# Altium PCB PCB1bjarni.PcbDoc
Units mil, origin at the board's own origin, x right, y up, seen from the top; angles counter-clockwise.
Board outline 3165.25 x 5115 mil, 2 copper layers (Top Layer, Bottom Layer); 82 components, 72 nets, 267 pads, 22 vias.
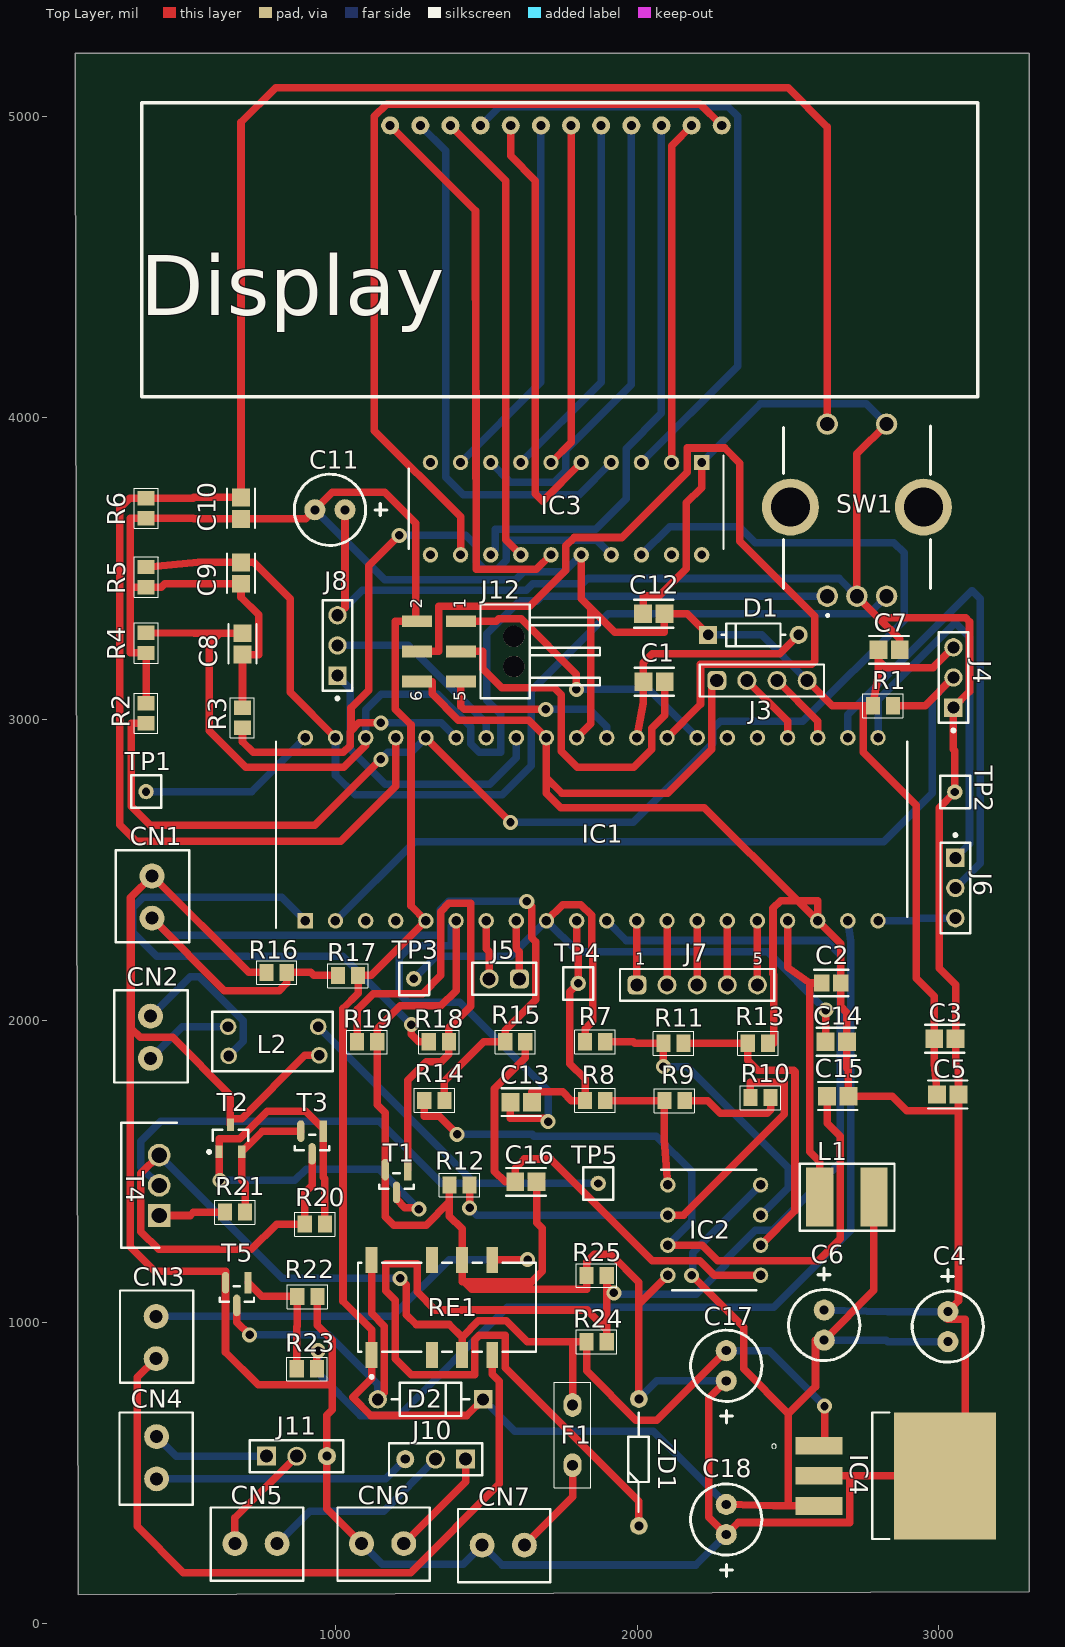
[diagram p0: Top Layer view]
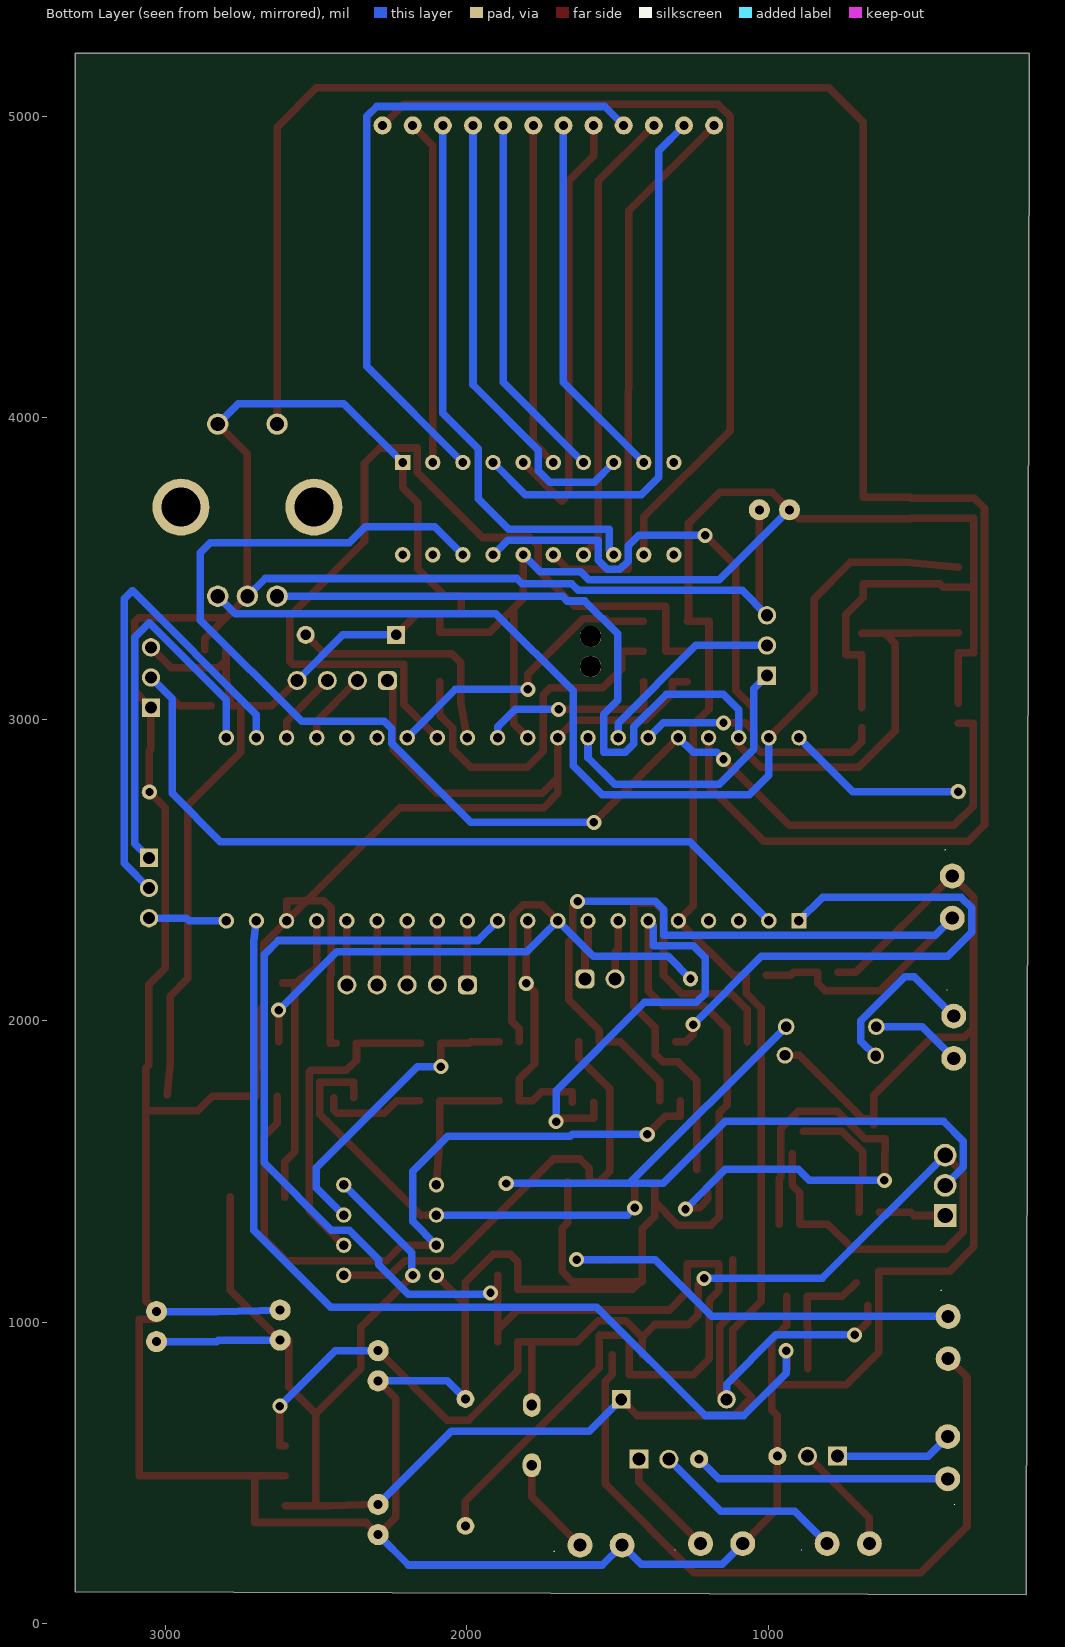
[diagram p1: Bottom Layer view, seen from below]

## Layer stack, top to bottom
Top Solder: solder mask 0.4, Solder Resist, Dk 3.5
Top Layer: signal copper 1.4
Dielectric 1: dielectric 12.6, FR-4, Dk 4.8
Bottom Layer: signal copper 1.4
Bottom Solder: solder mask 0.4, Solder Resist, Dk 3.5

## Board outline
3300,5210 3300,5085 3300,105 145,95 145,110 135,5085 135,5050 134.75,5210

## Design rules (kind name [scope] priority, off if disabled: settings)
Clearance [All] p1: gap=10 ignorepadtopadclearanceinfootprint=FALSE
HoleSize [All] p1: absolutevalues=TRUE maxlimit=200 minlimit=1 maxpercent=80.000 minpercent=20.000
PolygonConnect [All] p1: connectstyle=Relief reliefconductorwidth=10 reliefentries=4 polygonreliefangle="90 Angle" airgapwidth=10
RoutingVias [All] p1: holewidth=28 width=50 viastyle="Through Hole" minholewidth=28 minwidth=50 maxholewidth=28 maxwidth=50
SilkToSilkClearance [All] p1: silktosilkclearance=0
SilkToSolderMaskClearance [IsPad] p1: minsilkscreentomaskgap=0 clearancetoexposedcopper=TRUE
SolderMaskExpansion [All] p1: expansion=4 istentingtop=FALSE
Width [All] p1: maxlimit=30 minlimit=20 preferedwidth=25 minimp=50.000000 maximp=50.000000 favimp=50.000000
27 further rules are at their usual default settings.

## Classes and differential pairs
component class SolBoutout: CN2 L2 R18 R19 R20 R21 T1 T2 T3 T4 TP5
component class SolBoutin: C13 C14 C15 C16 CN1 IC2 R7 R8 R9 R10 R11 R12 R13 R14 R15 R16 R17 TP3 TP4
component class Display: C8 C9 C10 C11 C12 IC3 J9 R4 R5 R6 SW1
component class CPU: C1 C2 C3 C4 C5 C6 C7 D1 IC1 J1 J3 J4 J5 J6 J7 J8 J12 L1 R1 R2 R3 TP1 TP2
component class "Bat 20Vvoeding": C17 C18 CN3 CN4 CN5 CN6 CN7 D2 F1 IC4 J10 J11 R22 R23 R24 R25 RE1 T5 ZD1

## Components (designator, comment, footprint, x,y, rotation, side; value= is the part's Value field where it differs from the comment)
C1 "10n" FP-C0805C-DN-IPC_A 2055.46,3125 r0 top value="10,000 pF"
C2 "100n" FP-C0805C-DN-IPC_B 2643.47,2125 r0 top value="10,000 pF"
C3 "100n" FP-C0805C-DN-IPC_A 3020.46,1940 r0 top value="10,000 pF"
C4 "10µF 50V" caprad100mil 3030,935 r90 top
C5 "100n" FP-C0805C-DN-IPC_A 3030,1755 r0 top value="10,000 pF"
C6 "10uF 50V" caprad100mil 2620,940 r90 top
C7 "10n" FP-C0805C-DN-IPC_A 2835,3230 r0 top value="10,000 pF"
C8 "10n" FP-C0805C-DN-IPC_A 690,3250 r90 top value="10,000 pF"
C9 "10n" FP-C0805C-DN-IPC_A 685,3485 r90 top value="10,000 pF"
C10 "10n" FP-C0805C-DN-IPC_A 685,3700.46 r90 top value="10,000 pF"
C11 "100uF" caprad100mil 930,3695 r0 top
C12 "100n" FP-C0805C-DN-IPC_A 2054.54,3350 r180 top value="10,000 pF"
C13 "10n" FP-C0805C-DN-IPC_A 1614.54,1730 r180 top value="10,000 pF"
C14 "10n" FP-C0805C-DN-IPC_A 2660,1930 r0 top value="10,000 pF"
C15 "10n" FP-C0805C-DN-IPC_A 2665,1750 r0 top value="10,000 pF"
C16 "10n" FP-C0805C-DN-IPC_A 1630.46,1465 r0 top value="10,000 pF"
C17 "100µF 25V" caprad100mil 2295,905 r270 top
C18 "10µF 50V" caprad100mil 2295,395 r270 top
CN1 "282836-2" cnn2pin 390,2410 r90 top
CN2 "282836-2" cnn2pin 385,1945 r90 top
CN3 "282836-2" cnn2pin 403.48,948.64 r90 top
CN4 "282836-2" cnn2pin 405,550 r270 top
CN5 "282836-2" cnn2pin 735,265 r0 top
CN6 "282836-2" cnn2pin 1155,265 r0 top
CN7 "282836-2" cnn2pin 1555,260 r0 top
D1 "1N4148" FP-017AG-MFG 2385,3280 r0 top
D2 "1N4007" FP-1N4007-MFG 1313.48,743.64 r180 top value=15pF
DP1 "ELCO220uF" display 355,4070 r0 top
F1 "4,7K" Fuze -3315,-42975 r270 top
IC1 "ATMEGA4809-PF" DIP1543W58P254L5175H635Q40N 1848.48,2634.9 r90 top
IC2 "MCP6002-E/P" DIP8PIN 2255,1305 r0 top
IC3 "TM1637" DIP778W53P254L2612H431Q20N 1763.48,3698.64 r270 top
IC4 "TL780-05CKTTR" TL78005CKTTR 2868.23,490 r270 top
J3 "61300411121" 61300411121 2413.48,3128.64 r0 top
J4 "22-28-4033" MOLX-22-28-4033_V 3048.48,3138.64 r90 top
J5 "61300211121" 61300211121 1558.48,2138.64 r180 top
J6 "22-28-4033" MOLX-22-28-4033_V 3055,2440 r270 top
J7 "61300511121" 61300511121 2198.48,2118.64 r0 top
J8 "22-28-4033" MOLX-22-28-4033_V 1005,3245 r90 top
J10 "" 3pinsheader 1330,545 r180 top
J11 "" 3pinsheader 870,555 r0 top
J12 "610106249121" 610106249121 1561.26,3225 r90 top
L1 "10µH" spoelSMD10µH 2695,1415 r0 top
L2 "Spoel" CoilCM2545 642,1980 r0 top
R1 "4K7" res0805ph 2815,3045 r0 top
R2 "4K7" res0805ph 370,3020 r270 top
R3 "4K7" res0805ph 690,3005 r270 top
R4 "10K" res0805ph 370,3253.46 r90 top
R5 "10K" res0805ph 370,3471.53 r90 top
R6 "10K" res0805ph 370,3700 r90 top
R7 "5K6" res0805ph 1860,1930 r180 top
R8 "5K6" res0805ph 1860,1735 r180 top
R9 "18K" res0805ph 2123.47,1735 r0 top
R10 "18K" res0805ph 2408.47,1745 r0 top
R11 "18K" res0805ph 2120,1925 r180 top
R12 "100E" res0805ph 1410,1455 r0 top
R13 "100E" res0805ph 2400,1925 r180 top
R14 "5K6" res0805ph 1326.54,1735 r180 top
R15 "5K6" res0805ph 1595,1930 r0 top
R16 "10M" res0805ph 803.46,2160 r0 top
R17 "1M" res0805ph 1040,2150 r0 top
R18 "10K" res0805ph 1341.54,1930 r0 top
R19 "4,7K" res0805ph 1103.46,1930 r0 top
R20 "4,7K" res0805ph 930,1325 r0 top
R21 "100E" res0805ph 665,1365 r0 top
R22 "4,7K" res0805ph 905,1085 r0 top
R23 "10K" res0805ph 903.46,845 r0 top
R24 "6,8K" res0805ph 1865,935 r0 top
R25 "10K" res0805ph 1865,1155 r0 top
RE1 "G6S-2F-DC5" FP-G6S-2F-DC5-MFG 1368.48,1048.64 r0 top
SW1 "PEC11R-4" PEC12R-4XXXF-SXXXX_1 2728.48,3703.64 r0 top
T1 "BC847B" sot23 1200,1495 r270 top
T2 "BC857C" INF-SOT23_N 650,1610 r90 top
T3 "BC847B" sot23 919.88,1622.84 r270 top
T4 "IRF9Z34NPBF" TO254P469X1042X1967-3P 413.48,1353.64 r90 top
T5 "BC847B" sot23 670,1120 r270 top
TP1 "testpoint" testpin 370,2760 r0 top
TP2 "testpoint" testpin 3053.48,2758.64 r0 top
TP3 "testpoint" testpin 1258.48,2138.64 r0 top
TP4 "testpoint" testpin 1803.48,2123.64 r0 top
TP5 "testpoint" testpin 1870,1460 r0 top
ZD1 "5V1" DIOAD1068W53L380D172 2005,323.74 r90 top

## Footprints (in the part's own frame and the unit in brackets; to place one, negate y for a bottom-side part, rotate by r counter-clockwise, add the part's x,y. Pads: shape width x height; smd on the part's side, far side on the other; paste and mask are expansions set on the pad)
3pinsheader [mm] "Pin Header, pitch 2.54 mm, THT, Vertical, single row, 2p"
  rect 1.6x1.6 hole 1.1: 1(-2.54,0)
  round 1.6 hole 1.1: 2(0,0)
  round 1.524 hole 0.762: 3(2.54,0)
  silkscreen extent -3.96,-1.34 3.91,1.34
61300211121 [mm] "Pin Header, pitch 2.54 mm, THT, Vertical, single row, 2p"
  rrect50% 1.6x1.6 hole 1.1: 1(-1.27,0)
  round 1.6 hole 1.1: 2(1.27,0)
  silkscreen extent -2.69,-1.35 2.69,1.34, body extent -2.54,-1.27 2.54,1.27, height 8.57
61300411121 [mm] "Pin Header, pitch 2.54 mm, THT, Vertical, single row, 4p"
  rrect50% 1.6x1.6 hole 1.1: 1(-3.81,0)
  round 1.6 hole 1.1: 2(-1.27,0) 3(1.27,0) 4(3.81,0)
  silkscreen extent -5.23,-1.34 5.23,1.35, body extent -5.08,-1.27 5.08,1.27, height 8.57
61300511121 [mm] "Pin Header, pitch 2.54 mm, THT, Vertical, single row, 5p"
  rrect50% 1.6x1.6 hole 1.1: 1(-5.08,0)
  round 1.6 hole 1.1: 2(-2.54,0) 3(0,0) 4(2.54,0) 5(5.08,0)
  silkscreen extent -6.5,-1.34 6.5,1.35, body extent -6.35,-1.27 6.35,1.27, height 8.57
610106249121 [mm] "Pin Header, pitch 2.54 mm, SMD, Angled, dual row, 6p"
  rect 1x2.5 smd: 1(2.54,3.72) 2(2.54,7.42) 3(0,3.72) 4(0,7.42) 5(-2.54,3.72) 6(-2.54,7.42)
  round 1.8 hole 1.8 unplated: MH1(1.27,-0.73) MH2(-1.27,-0.73)
  silkscreen extent -3.96,-8 3.96,2.08, body extent -3.81,-8 3.81,8.16, height 5.1
caprad100mil [mil]
  round 70 hole 30: 1(0,0) 2(100,0)
  silkscreen extent -68,-118 239,118
cnn2pin [mm]
  round 2.1 hole 1.1: 1(-1.778,0) 2(1.778,0)
  silkscreen extent -3.81,-3.12 3.96,3.05
CoilCM2545 [mm]
  round 1.4 hole 0.9: 1(0,0) 2(0.051,-2.464) 3(7.696,-2.413) 4(7.595,0)
  silkscreen extent -1.32,-3.75 8.84,1.25
DIOAD1068W53L380D172 [mm]
  round 1.5 hole 0.75: 1(0,0) 2(10.7,0)
  silkscreen extent 1.18,-0.83 9.55,0.89
DIP8PIN [mm]
  round 1.3 hole 0.8: 1(-3.905,3.81) 2(-3.905,1.27) 3(-3.905,-1.27) 4(-3.905,-3.81) 5(3.905,-3.81) 6(3.905,-1.27) 7(3.905,1.27) 8(3.905,3.81)
  silkscreen extent -4.48,-5.08 3.56,5.08, body extent -4.04,-4.75 4.04,4.75, height 5.33
DIP778W53P254L2612H431Q20N [mm]
  rect 1.3x1.3 hole 0.73: 1(-3.892,11.43)
  round 1.3 hole 0.73: 2(-3.892,8.89) 3(-3.892,6.35) 4(-3.892,3.81) 5(-3.892,1.27) 6(-3.892,-1.27) 7(-3.892,-3.81) 8(-3.892,-6.35) 9(-3.892,-8.89) 10(-3.892,-11.43) 11(3.892,-11.43) 12(3.892,-8.89) 13(3.892,-6.35) 14(3.892,-3.81) 15(3.892,-1.27) 16(3.892,1.27) 17(3.892,3.81) 18(3.892,6.35) 19(3.892,8.89) 20(3.892,11.43)
  silkscreen extent -4.46,-13.27 3.37,13.27, body extent -4.03,-13.06 4.03,13.06, height 4.31
DIP1543W58P254L5175H635Q40N [mm]
  rect 1.3x1.3 hole 0.8: 1(-7.715,24.13)
  round 1.3 hole 0.8: 2(-7.715,21.59) 3(-7.715,19.05) 4(-7.715,16.51) 5(-7.715,13.97) 6(-7.715,11.43) 7(-7.715,8.89) 8(-7.715,6.35) 9(-7.715,3.81) 10(-7.715,1.27) 11(-7.715,-1.27) 12(-7.715,-3.81) 13(-7.715,-6.35) 14(-7.715,-8.89) 15(-7.715,-11.43) 16(-7.715,-13.97) 17(-7.715,-16.51) 18(-7.715,-19.05) 19(-7.715,-21.59) 20(-7.715,-24.13) 21(7.715,-24.13) 22(7.715,-21.59) 23(7.715,-19.05) 24(7.715,-16.51) 25(7.715,-13.97) 26(7.715,-11.43) 27(7.715,-8.89) 28(7.715,-6.35) 29(7.715,-3.81) 30(7.715,-1.27) 31(7.715,1.27) 32(7.715,3.81) 33(7.715,6.35) 34(7.715,8.89) 35(7.715,11.43) 36(7.715,13.97) 37(7.715,16.51) 38(7.715,19.05) 39(7.715,21.59) 40(7.715,24.13)
  silkscreen extent -8.31,-26.61 7.37,26.61, body extent -7.86,-25.88 7.86,25.88, height 6.35
display [mil]
  round 60 hole 30: 1(825,900) 2(925,900) 3(1025,900) 4(1125,900) 5(1225,900) 6(1325,900) 7(1425,900) 8(1525,900) 9(1625,900) 10(1725,900) 11(1825,900) 12(1925,900)
  silkscreen extent 0,0 2775,975
FP-1N4007-MFG [mm]
  rect 1.55x1.55 hole 1 paste-2539.97 mask+0: 1(-4.44,0)
  round 1.55 hole 1 paste-2539.97 mask+0: 2(4.44,0)
  silkscreen extent -3.27,-1.4 3.27,1.4, body extent -5.32,-1.5 5.32,1.5, height 0.25
FP-017AG-MFG [mil]
  rect 60x60 hole 35 paste-99999 mask+0: 1(-150.12,0)
  round 60 hole 35 paste-99999 mask+0: 2(150.12,0)
  silkscreen extent -106,-38 106,38, body extent -178,-42 178,42, height 10
FP-C0805C-DN-IPC_A [mil]
  rect 59.24x61.27 smd paste+0 mask+0: 1(-35.46,0) 2(35.46,0)
  silkscreen extent -65,-46 65,46, body extent -85,-50 85,50, height 10
FP-C0805C-DN-IPC_B [mil]
  rect 51.36x57.33 smd paste+0 mask+0: 1(-31.53,0) 2(31.53,0)
  silkscreen extent -57,-44 57,44, body extent -67,-39 67,39, height 10
FP-G6S-2F-DC5-MFG [mm]
  rect 1x2.2 smd paste+0 mask+0: 1(-6.35,-4) 3(-1.27,-4) 4(1.27,-4) 5(3.81,-4) 8(3.81,4) 9(1.27,4) 10(-1.27,4) 12(-6.35,4)
  silkscreen extent -7.5,-5.97 7.5,3.75
Fuze [mm]
  oval 2x1.5 hole 0.9: 1(-1109.98,129.54)
  oval 2x1.524 hole 0.9: 2(-1104.9,129.54)
  silkscreen extent -1111.89,128.02 -1103,131.06
INF-SOT23_N [mm] "SOT23, 3-Leads, Body 2.9x1.3 mm, Pitch 0.95 mm, IPC Medium Density"
  rect 1.05x0.6 smd: 1(-1.15,0.95) 2(-1.15,-0.95) 3(1.15,0)
  silkscreen extent -1.27,-1.5 0.7,1.92, body extent -0.7,-1.5 0.7,1.5, height 1.1
MOLX-22-28-4033_V [mm] "THD, 3-Leads, Body 7.62x2.49mm, Pitch 2.54mm"
  rect 1.55x1.55 hole 1.02: 1(-2.54,0)
  round 1.55 hole 1.02: 2(0,0) 3(2.54,0)
  silkscreen extent -4.58,-1.24 3.81,1.25, body extent -3.81,-1.24 3.81,1.24, height 8.38
PEC12R-4XXXF-SXXXX_1 [mm]
  round 1.8 hole 1.2: 1(-2.5,-7.5) 2(2.5,-7.5) 3(0,-7.5) 4(-2.5,7) 5(2.5,7)
  round 4.8 hole 3.28: 6(5.6,0) 7(-5.6,0)
  silkscreen extent -6.2,-9.2 6.2,6.84
res0805ph [mm]
  rect 1.2x1.45 smd: 1(-0.85,0) 2(0.85,0)
  silkscreen extent -1.7,-1.02 1.7,0.99, body extent -1.1,-0.72 1.1,0.72, height 0.6
sot23 [mil]
  rect 71.82x24.33 smd paste+0 mask+0: 1(-10.8,38.4)
  rrect100% 71.82x24.33 smd paste+0 mask+0: 2(-10.8,-36.4) 3(64.8,1)
  silkscreen extent 1,-56 53,58, body extent -66,-76 120,78, height 10
spoelSMD10µH [mm]
  rect 2.3x5 smd: 1(-2.286,0) 2(2.286,0)
  silkscreen extent -3.98,-2.84 4.01,2.8
testpin [mm]
  round 1.3 hole 0.7: 1(0,0)
  silkscreen extent -1.24,-1.37 1.29,1.37
TL78005CKTTR [mm]
  rect 1.5x4 smd: 1(-2.54,-6.745) 2(0,-6.745) 3(2.54,-6.745)
  rect 10.7x8.6 smd: 4(0,3.855)
  silkscreen extent -5.33,-10.73 5.33,-0.8
TO254P469X1042X1967-3P [mm]
  rect 1.92x1.92 hole 1.28: 1(0,0)
  round 1.92 hole 1.28: 2(2.54,0) 3(5.08,0)
  silkscreen extent -2.73,-1.49 7.81,3.2, body extent -2.67,-1.5 7.75,3.19, height 18.84

## Part data
C1 C2 C3 C5 C7 C8 C9 C10 C12 C13 C14 C15 C16: library part CMP-2007-00259-2, "CAP CER 10000PF 200V X7R 0805", Capacitance="10,000 pF", Manufacturer=KEMET, Manufacturer Part Number=C0805C103K2RACTU, Package=C0805C-DN, Temperature="-55°C to +125°C", Temperature Characteristic=X7R, Temperature Coefficient=30ppm/°C, Temperature Range High=+125°C, Temperature Range Low=-55°C, Tolerance=0.1, Voltage Rating="200 V", Automotive=No, Category=Cap, ComponentLink2Description=Datasheet, ComponentLink2URL=https://content.kemet.com/datasheets/KEM_C1003_C0G_SMD.pdf, Device Class L1="Passive Components", Device Class L2=Capacitors, Device Class L3="Ceramic Capacitors", Digikey Description="CAP CER 10000PF 200V X7R 0805", Height=0.88mm, Ipc Land Pattern Name=CAPC200125X78, Lead Free=Yes, Material=Ceramic, Mouser Description="KEMET - C0805C103K2RACTU - CAP, MLCC, X7R, 10NF, 200V, 0805", Octopart=https://octopart.com/c0805c103k2ractu-kemet-9138347, RoHS=TRUE
C4 C6 C11 C17 C18: library part ELCO220uF, "Capacitor Polarised", Manufacturer_Name=Kemet, Manufacturer_Part_Number=T494D227K006AT, Mouser Part Number=80-T494D227K006, Datasheet Link=https://datasheet.datasheetarchive.com/originals/distributors/Datasheets-DGA21/1893029.pdf, Height=3.1mm, Mouser Price/Stock=https://www.mouser.co.uk/ProductDetail/KEMET/T494D227K006AT/?qs=KZyWKl2lJVCDSHmnBye8LQ%3D%3D
CN1 CN2 CN3 CN4 CN5 CN6 CN7: library part CNN2P, "Female Header, Pitch 5 mm, 1 x 2 Position, Height 10 mm, Tail Length 3.5 mm, Rohs, Bulk", Color=Green, Current=13.5A, Manufacturer="TE Connectivity", Package Description="Female Header, Pitch 5 mm, 1 x 2 Position, Height 10 mm, Tail Length 3.5 mm", Package Reference=THD, Standard Package=300, Voltage=300V, 3D Model=282836-2.pdf, Category=Connectors,Interconnects, Clamp Material - Plating=Brass-NickelPlated, Contact Material - Plating=Brass-TinPlated, Datasheet URL=http://www.te.com.cn/commerce/DocumentDelivery/DDEController?Action=showdoc&DocId=Catalog+Section%7F1308389_EUROSTYLE_TERMINAL_BLOCKS%7F0607%7Fpdf%7FEnglish%7FENG_CS_1308389_EUROSTYLE_TERMINAL_BLOCKS_0607.pdf%7F282836-2, Dynamic Catalog=BuchananSeries, Family=TerminalBlocks-WiretoBoard, Featured Product=EurostyleTerminalBlockConnectors, Features=Interlocking(Side), Housing Material=Polyamide(PA66),Nylon6/6, Manufacturer URL=http://www.te.com, Mating Orientation=HorizontalwithBoard, Mounting Type=ThroughHole, Number of Levels=1, Other Names="5ULV-02B / A98076", Packaging=Bulk, Pitch="0.197\"(5.00mm)", Positions Per Level=2, Product Training Modules=Wire-to-BoardEurostyleTerminalBlocks, RoHS Information=282836-2StatementofCompliance, Screw Material - Plating=Brass-NickelPlated, Screw Thread=M3, Series=Buchanan, Torque - Screw=0.68Nm(6Lb-In), Wire Gauge=16-30AWG, Wire Termination=Screw-RisingCageClamp
D1: library part CMP-07163-000046-1, "DIODE GEN PURP 100V 200MA DO35", Average Rectified Current=200mA, Capacitance=4pF, Case/Package=DO-35, Current=4A, Forward Current=300mA, Forward Voltage=1V, Max Forward Surge Current (Ifsm)=1A, Max Operating Temperature=175°C, Max Power Dissipation=500mW, Max Repetitive Reverse Voltage (Vrrm)=100V, Max Reverse Current=5uA, Min Operating Temperature=-65°C, Package Quantity=2000, Contact Plating=Tin, Current Rating=200mA, Diameter=1.91mm, Element Configuration=Single, Height=4.56mm, Lead Free="Lead Free", Length=4.56mm, Max Reverse Voltage (DC)=100V, Max Surge Current=4A, Mount="Through Hole", Number of Pins=2, Output Current=200mA, Outside Diameter=1.85mm, Packaging=Bulk, Peak Non-Repetitive Surge Current=4A, Polarity=Standard, Power Dissipation=500mW, Radiation Hardening=No, REACH SVHC="No SVHC", Recovery Time=4ns, Reverse Recovery Time=4ns, Reverse Voltage=100V, Series=-, Voltage=100V, Voltage Rating (DC)=100V, Weight=0.01lb, Width=1.91mm
D2: library part CMP-123542-000001-1, "Rectifier diode 1000 V 1 A DO-41, ,", Capacitance=15pF, Forward Current=1A, Manufacturer=Diotec, Max Junction Temp=+175°C, Max Repetitive Reverse Voltage=1000V, Max Surge Forward Current=27A, Peak Reverse Current=5uA, Temperature="-50°C to +175°C", Temperature Range Low=-50°C, Automotive=No, Category=Diode, ComponentLink2Description=Datasheet, ComponentLink2URL=https://datasheet.octopart.com/1N4007-Diotec-datasheet-62346875.pdf, Device Class L1="Discrete Semiconductors", Device Class L2=Diodes, Device Class L3="Rectifier Diodes", Height=2.8mm, Ipc Land Pattern Name=DIOAD888W100L520D280, Lead Free=Yes, Manufacturer Part Number=1N4007, Octopart=https://octopart.com/1n4007-diotec-4040411, Package=1N4007, Reverse Voltage=1000V, RoHS=TRUE, Temperature Range High=+175°C
DP1: library part Display, "Capacitor Polarised", Manufacturer_Name=Kemet, Manufacturer_Part_Number=T494D227K006AT, Mouser Part Number=80-T494D227K006, Datasheet Link=https://datasheet.datasheetarchive.com/originals/distributors/Datasheets-DGA21/1893029.pdf, Height=3.1mm, Mouser Price/Stock=https://www.mouser.co.uk/ProductDetail/KEMET/T494D227K006AT/?qs=KZyWKl2lJVCDSHmnBye8LQ%3D%3D
F1: library part Fuze, "Resistor", Manufacturer_Name="TE Connectivity", Manufacturer_Part_Number=CPF0201D10K2C1, Mouser Part Number=N/A, Datasheet Link=http://www.te.com/commerce/DocumentDelivery/DDEController?Action=showdoc&DocId=Data+Sheet%7F1773200-1%7FA%7Fpdf%7FEnglish%7FENG_DS_1773200-1_A.pdf%7F4-2176215-6, Height=0.28mm, Mouser Price/Stock=https://www.mouser.com/Search/Refine.aspx?Keyword=N%2FA
IC1: "Integrated Circuit", Manufacturer_Name=Microchip, Mouser Part Number=556-ATMEGA4809-PF, Datasheet Link=http://ww1.microchip.com/downloads/en/DeviceDoc/40-pin-Data-Sheet-megaAVR-0-series-DS40002104A.pdf, Height=6.35mm, Manufacturer_Part_Number=ATMEGA4809-PF, Mouser Price/Stock=https://www.mouser.co.uk/ProductDetail/Microchip-Technology-Atmel/ATMEGA4809-PF?qs=T3oQrply3y9UlpZbCygk%252BQ%3D%3D
IC2: library part AMP-OPA-MCP6002-IL8, "None", Case/Package=PDIP, Input Bias Current=1pA, Input Offset Voltage (Vos)=4.5mV, Max Operating Temperature=125°C, Max Supply Voltage=6V, Min Operating Temperature=-40°C, Min Supply Voltage=1.8V, Nominal Supply Current=100uA, Operating Supply Voltage=5.5V, Output Current=23mA, Package Quantity=60, Power Supply Rejection Ratio (PSRR)=86dB, Voltage Gain=112dB, Amplifier Type="GENERAL PURPOSE", Bandwidth=1MHz, Common Mode Rejection Ratio=60dB, Gain Bandwidth Product=1MHz, Height=3.3mm, Input Offset Voltage-Max=4.5mV, Lead Free="Lead Free", Length=9.27mm, Mount="Through Hole", Number of Amplifiers=2, Number of Channels=2, Number of Circuits=2, Number of Elements=2, Number of Pins=8, Operating Supply Current=100uA, Output Current per Channel=23mA, Packaging=Rail/Tube, Radiation Hardening=No, REACH SVHC="No SVHC", RoHS Compliant=Yes, Slew Rate=0.6V/µs, Slew Rate-Nom=0.6V/µs, Supply Current=100uA, Technology=CMOS, Unity Gain Bandwidth Product=1MHz, Width=6.35mm
IC3: "Integrated Circuit", Manufacturer_Name="TITAN MICRO ELECTRONICS", Height=4.31mm, Manufacturer_Part_Number=TM1637
IC4: "Integrated Circuit", Manufacturer_Name="Texas Instruments", Datasheet Link=http://www.ti.com/general/docs/suppproductinfo.tsp?distId=26&gotoUrl=http%3A%2F%2Fwww.ti.com%2Flit%2Fgpn%2Ftl780, Height=5.08mm, Manufacturer_Part_Number=TL780-05CKTTR
J3: library part CMP-1502-01064-2, Color=Black, Contact Resistance=20mΩ, Current Rating=3A, Max Operating Temperature=105°C, Min Operating Temperature=-40°C, Operating Supply Voltage=250V, Connector Type="Male Pin", Contact Material=Copper, Contact Mating Length=5.9944mm, Contact Plating=Gold, Gender=Male, Height=8.89mm, Lead Free="Lead Free", Lead Pitch=2.54mm, Mount="Through Hole", NexarPartId=32855522, Number of Contacts=4, Number of Pins=4, Number of Positions=4, Number of Rows=1, Orientation=Vertical, Packaging=Bulk, Pitch=2.54mm, REACH SVHC=Unknown, RoHS=Compliant, Termination=Solder, Voltage Rating=250V
J4 J6 J8: library part CMP-1676-00001-5, "Male Header, Pitch 2.54 mm, 1 x 3 Position, Height 8.38 mm, Tail Length 3.18 mm, RoHS, Bulk", Colour=Black, Current Rating="4 A", Manufacturer=Molex, Max Operating Temperature="75 degC", Min Operating Temperature="0 degC", Package Quantity=1, Voltage Rating="250 V", ComponentLink1Description="Manufacturer URL", ComponentLink1URL=http://www.molex.com/, ComponentLink2Description=Datasheet, ComponentLink2URL=http://www.molex.com/pdm_docs/sd/022284033_sd.pdf, Contact Finish=Gold, Contact Material=Brass, Contact Plating=Gold, DatasheetVersion="Rev. G, 01/2012", Height="8.38 mm", Lead Pitch="0.1 inch", Length="7.62 mm", Mount="Through Hole", Mounting Technology="Through Hole", PackageDescription="Male Header, Pitch 2.54 mm, 1 x 3 Position, Height 8.38 mm, Tail Length 3.18 mm", PackageReference=22-28-4033, Packaging=Bulk, Pins=3, REACH SVHC=Unknown, RoHSCompliant=true, Rows=1
J5: library part CMP-1712-00002-5, Color=Black, Contact Resistance=20mΩ, Current Rating=3A, Max Operating Temperature=125°C, Min Operating Temperature=-40°C, Operating Supply Voltage=250V, Connector Type="Male Pin", Contact Gender=Male, Contact Material=Copper, Contact Mating Length=5.9944mm, Contact Plating=Gold, Gender=Male, Height=8.94mm, Housing Material=PBT, Lead Free="Lead Free", Lead Pitch=2.54mm, Mount="Through Hole", NexarPartId=20081794, Number of Contacts=2, Number of Pins=2, Number of Positions=2, Number of Rows=1, Orientation=Vertical, Packaging=Bulk, Pitch=2.54mm, REACH SVHC="No SVHC", RoHS=Compliant, Termination="Through Hole", Voltage Rating=250V
J7: library part CMP-1502-01068-2, Color=Black, Contact Resistance=20mΩ, Current Rating=3A, Max Operating Temperature=105°C, Min Operating Temperature=-40°C, Operating Supply Voltage=250V, Connector Type="Male Pin", Contact Material=Copper, Contact Mating Length=5.9944mm, Contact Plating=Gold, Gender=Male, Height=8.89mm, Lead Free="Lead Free", Lead Pitch=2.54mm, Mount="Through Hole", NexarPartId=32855526, Number of Contacts=5, Number of Pins=5, Number of Positions=5, Number of Rows=1, Orientation=Vertical, Packaging=Bulk, Pitch=2.54mm, REACH SVHC=Unknown, RoHS=Compliant, Termination=Solder, Voltage Rating=250V
J10 J11: library part header3pin, "THT Vertical Pin Header WR-PHD, Pitch 2.54 mm, Single Row, 2 pins", Contact Resistance=20mOhm, Manufacturer="Wurth Elektronik", Manufacturer Part Number=61300211121, Operating Temperature=-40to105degC, Rated Current=3A, Withstanding Voltage=500VAC, Working Voltage=250VAC, Datasheet URL=https://katalog.we-online.de/em/datasheet/6130xx11121.pdf, Gender=Male, Manufacturer URL=http://www.we-online.de, Mounting Technology=THT, Orientation=Vertical, Package Reference=61300211121, Packaging=Bag, Part Number=61300211121, Pin Number=2, Pitch=2.54mm, Publisher=WurthElektronik, Row Number=Single
J12: library part CMP-1502-01146-2, Color=Black, Contact Resistance=20mΩ, Current Rating=3A, Operating Supply Voltage=250V, Connector Type="Male Pin", Contact Mating Length=5.9944mm, Contact Plating=Gold, Gender=Male, Lead Pitch=2.54mm, Mount="Surface Mount", NexarPartId=52645089, Number of Contacts=6, Number of Pins=6, Number of Positions=6, Number of Rows=2, Packaging="Tape and Reel", Pitch=2.54mm, REACH SVHC=Unknown, RoHS=Compliant, Row Spacing=2.54mm, Termination=Solder
L1: library part Spoel_1
R1 R2 R3 R4 R5 R6 R7 R8 R9 R10 R11 R12 R13 R14 R15 R16 R17 R18 R19 R20 R21 R22 R23 R24 R25: library part Res, "Resistor", Manufacturer_Name="TE Connectivity", Manufacturer_Part_Number=CPF0201D10K2C1, Mouser Part Number=N/A, Datasheet Link=http://www.te.com/commerce/DocumentDelivery/DDEController?Action=showdoc&DocId=Data+Sheet%7F1773200-1%7FA%7Fpdf%7FEnglish%7FENG_DS_1773200-1_A.pdf%7F4-2176215-6, Height=0.28mm, Mouser Price/Stock=https://www.mouser.com/Search/Refine.aspx?Keyword=N%2FA
RE1: library part CMP-08823-000012-1, "RELAY TELECOM DPDT 2A 5VDC", Ambient Temperature Range High=+85°C, Ambient Temperature Range Low=-40°C, Coil Current=28.1mA, Coil Power=140mW, Coil Resistance=178Ω, Coil Voltage=5V, Current Rating=2A, Manufacturer=Omron, Temperature="-40°C to +85°C", Automotive=No, Category=Relay, Coil Type=Non-Latching, ComponentLink2Description=Datasheet, ComponentLink2URL=https://omronfs.omron.com/en_US/ecb/products/pdf/en-g6s.pdf, Device Class L1=Electromechanical, Device Class L2=Relays, Device Class L3="Signal Relays", Digikey Description="RELAY TELECOM DPDT 2A 5VDC", Height=9.4mm, Lead Free=Yes, Manufacturer Part Number=G6S-2F-DC5, Mouser Description="Electromechanical Relay 5VDC 178Ohm 2A DPDT (14.8x9.2x9.2)mm SMD Signal Relay", Number of Contacts=2, Octopart=https://octopart.com/g6s-2f-dc5-omron-85236, Package=G6S-2F-DC5, RoHS=TRUE, Standoff Height=0.35mm, Switching Current=2A, Temperature Range High=+85°C, Temperature Range Low=-40°C, Throw Configuration=DPDT
SW1: library part PEC11R-4225F-S0024, "Undefined or Miscellaneous", Manufacturer_Name=Bourns, Mouser2 Part Number=652-PEC11R-4225F-S24, Datasheet Link=https://componentsearchengine.com//PEC11R-4225F-S0024.pdf, Manufacturer_Part_Number=PEC11R-4225F-S0024, Mouser2 Price/Stock=https://www.mouser.com/Search/Refine.aspx?Keyword=652-PEC11R-4225F-S24
T1 T3 T5: library part BC847, "NPN Silicon AF Transistor, 45 V VCEO, 100 mA IC, SOT23, Reel, Green", Manufacturer=Infineon, ComponentLink1Description="Manufacturer URL", ComponentLink1URL=http://www.infineon.com/, ComponentLink2Description=Datasheet, ComponentLink2URL=http://www.infineon.com/dgdl/bc847series_bc848series_bc849series_bc850series.pdf?folderId=db3a304314dca389011541d30fa21656&fileId=db3a304314dca389011541d4630a1657, ComponentLink3Description="Package Specification", ComponentLink3URL=http://www.infineon.com/dgdl/SOT23-Package_Overview.pdf?folderId=db3a30431936bc4b0119532290053c66&fileId=db3a30431936bc4b0119533468123c85, fT (typ)="250Â MHz", Green=TRUE, IBM (max)="200Â mA", IC (max)="100Â mA", ICBO (max)="15Â nA", ICM (max)="200Â mA", Mounting Technology="Surface Mount", PackageDescription="3-Pin Small Outline Transistor Package, 1.3 x 2.9 mm Body, 0.95 mm Pitch", PackageReference=SOT23, PackageVersion=Apr-08, Packing=Reel, PartNumber=BC847B, Polarity=NPN, Ptot (max)="330Â mW", VCBO (max)="50Â V", VCEO (max)="45Â V", VEBO (max)="6Â V"
T2: library part CMP-1177-00039-1, "PNP Silicon AF Transistor, 45 V VCEO, 100 mA IC, SOT23, Reel, Green", Manufacturer=Infineon, ComponentLink1Description="Manufacturer URL", ComponentLink1URL=http://www.infineon.com/, ComponentLink2Description=Datasheet, ComponentLink2URL=http://www.infineon.com/dgdl/bc857series_bc858series_bc859series_bc860series.pdf?folderId=db3a304314dca389011541d30fa21656&fileId=db3a304314dca389011541da0e3a1661, ComponentLink3Description="Package Specification", ComponentLink3URL=http://www.infineon.com/dgdl/SOT23-Package_Overview.pdf?folderId=db3a30431936bc4b0119532290053c66&fileId=db3a30431936bc4b0119533468123c85, fT (typ)="250Â MHz", Green=TRUE, IBM (max)="200Â mA", IC (max)="100Â mA", ICBO (max)="15Â nA", ICM (max)="200Â mA", Mounting Technology="Surface Mount", PackageDescription="3-Pin Small Outline Transistor Package, 1.3 x 2.9 mm Body, 0.95 mm Pitch", PackageReference=SOT23, PackageVersion=Apr-08, Packing=Reel, PartNumber=BC857C, Polarity=PNP, Ptot (max)="330Â mW", VCBO (max)="50Â V", VCEO (max)="45Â V", VEBO (max)="5Â V"
T4: "MOSFET (P-Channel)", Manufacturer_Name=Infineon, Mouser Part Number=942-IRF9Z34NPBF, Arrow Part Number=IRF9Z34NPBF, Arrow Price/Stock=https://www.arrow.com/en/products/irf9z34npbf/infineon-technologies-ag?region=nac, Datasheet Link=https://www.infineon.com/dgdl/irf9z34npbf.pdf?fileId=5546d462533600a40153561220af1ddd, Height=4.69mm, Manufacturer_Part_Number=IRF9Z34NPBF, Mouser Price/Stock=https://www.mouser.co.uk/ProductDetail/Infineon-IR/IRF9Z34NPBF?qs=9%252BKlkBgLFf16a%2FvlD%252BMCtQ%3D%3D
ZD1: library part BZX79C3V3, "Zener Diode", Arrow Part Number=BZX79C6V8, Manufacturer_Name="ON Semiconductor", Mouser Part Number=512-BZX79C6V8, Arrow Price/Stock=https://www.arrow.com/en/products/bzx79c6v8/on-semiconductor, Datasheet Link=https://www.onsemi.com/pub/Collateral/BZX79C2V4-D.PDF, Manufacturer_Part_Number=BZX79C6V8, Mouser Price/Stock=https://www.mouser.co.uk/ProductDetail/ON-Semiconductor-Fairchild/BZX79C6V8?qs=G5AQjGfRJcK7HFctFTHqog%3D%3D

## Via types
v1: diameter 50, hole 28, Top Layer to Bottom Layer, 22 vias

## Nets (pads, with @x,y where several pads share a name; then routed paths per layer and width w, separated by ;. In a path a pad name is that pad's centre, name@x,y a point inside that pad or via, vN(x,y) a via of type N, cw(c..) or ccw(c..) an arc to the next point about the centre after c; other vN are vias at no path point)
+5: C3.1 C4.1 C5.1 C6.1 C7.1 C8.1 C9.1 C10.1 C11.1 C12.1 C18.1 D1.1 D2.1 IC1.5 IC1.31 IC2.8 IC3.16 IC4.3 J3.4 J4.3 J12.2 L1.2 R1.1 R2.1 R3.1 R4.1 R5.1 R6.1 R17.2 RE1.1 | length 14742
  Top Layer w25: R2.1 R4.1 318,3220 318,3438.07 ; R3.1 C8.1 744,3214.54 744,3346 685,3405 C9.1 431.54,3449.54 420.07,3438.07 R5.1 318,3438.07 ; J12.2 J12.2@1265,3325 ; D2.1 1434.65,690 1115,690 1055,750 1118.48,813.48 RE1.1 1118.48,974 1023.39,1069.09 1023.39,2040.39 1073.46,2090.46 R17.2 1117.32,2150 IC1.5 1249,2380.64 1249,2982 1197,3034 1197,3325 J12.2@1265,3325 ; IC1.31 1845.5,2985.66 1845.5,3367.98 ; IC3.16 1813.48,3400 1845.5,3367.98 ; v1(2180,1155) 2352.5,982.5 2352.5,844.5 2501,696 ; D1.1 2164.88,3350 C12.1 2090,3289 1924.48,3289 1845.5,3367.98 ; C18.1 2453,390 2501,390 ; J3.4 2647.12,3045 2750,3045 ; IC4.3 2501,390 ; L1.2 2785,1105 C6.1 2591,940 2591,786 2501,696 ; C7.1 2799.54,3196.46 ; C5.1 2985,1857.54 C3.1 2985,2081 2926,2140 2926,2714 2750,2890 2750,3045 ; J4.3 2980.84,3171 2825,3171 2799.54,3196.46 ; 318,3438.07 318,3666.54 R6.1 526,3666.54 527.54,3665 C10.1 900,3665 C11.1 988,3753 1162,3753 1265,3650 J12.2@1265,3325 ; 2501,390 2501,696 ; 2750,3045 R1.1 2799.54,3146 2799.54,3196.46
  Bottom Layer w25: C11.1 1162.68,3462.32 1596.57,3462.32 1623.25,3489 1757.07,3489 IC3.16 ; D2.1 1593.92,638 2052,638 C18.1 ; v1(2180,1155) 2183.74,1158.74 2183.74,1230 IC2.8 ; D1.1 2412.12,3280 J3.4 ; C6.1 2825,940 2830,935 C4.1
GND: C2.2 C3.2 C4.2 C5.2 C6.2 C7.2 C11.2 C12.2 C13.2 C14.2 C15.2 C16.2 C17.2 C18.2 CN1.2 CN6.1 CN7.1 IC1.6 IC1.18 IC1.32 IC2.4 IC3.1 IC4.2 IC4.4 J3.1 J4.1 J8.3 J11.3 J12.6 L2.3 R12.1 R13.1 R16.1 R19.2 R22.2 R25.1 RE1.9 SW1.3 SW1.5 T1.2 T2.3 T5.2 TP2.1 ZD1.2 | length 25626.9
  Top Layer w25: T2.3 T2.3@650,1675 ; R16.1 710,2160 CN1.2 321,2411 ; R22.2 938.46,989 988.5,938.96 988.5,792 ; L2.3 897,1885 687,1675 T2.3@650,1675 ; J8.3 1030,3370 C11.2 ; CN6.1 970,380 J11.3 970,691 988.5,709.5 988.5,792 ; J12.6 1319,3125 1319,3084.3 1406.3,2997 1640.12,2997 IC1.32 1698.48,2805.52 ; R12.1 1376.53,1398.53 ; IC1.6 1398.48,2100 1347.96,2049.48 1213.48,2049.48 1136.93,1972.93 R19.2 1136.93,1721.37 1163.6,1694.7 T1.2 1163.6,1350 1191.6,1322 1300,1322 1376.53,1398.53 ; C13.2 1579.07,1676 1693,1676 v1(1704,1665) ; C16.2 1665.93,1330.07 1684,1312 1684,1168 1650,1134 1425,1134 ; ZD1.2 2005,1058.74 ; C12.2 2019.07,3410.07 2073.07,3410.07 2163,3500 2163,3718 2213.48,3768.48 IC3.1 ; IC2.4 2005,1058.74 ; J3.1 2247,3112.16 2247,2900 2101,2754 1750,2754 1698.48,2805.52 ; C17.2 2237,747 2237,353 C18.2 2335,335 2704,335 2704,490 ; R13.1 2453,1925 2453,2152 2450,2155 2450,2373 2475,2398 2531.64,2398 ; IC4.2 2704,490 ; SW1.5 2728.48,3880.8 SW1.3 2799.84,3337 ; C7.2 2870.46,3266.38 2799.84,3337 ; 321,2411 318,2408 318,1250 399,1169 633.6,1169 T5.2 633.6,900 741.6,792 988.5,792 ; 321,2411 321,1974 350,1945 458,1945 650,1753 T2.3@650,1675 ; 1376.53,1398.53 1376.53,1350.95 1418.48,1309 RE1.9 1418.48,1140.52 ; 1418.48,1140.52 1418.48,1134 1425,1134 ; 1418.48,1140.52 1425,1134 ; 1425,1134 1450,1109 1831.54,1109 R25.1 1831.54,1200 1856.54,1225 1912.54,1225 2005,1132.54 2005,1058.74 ; 1698.48,2805.52 1698.48,2754 1745.48,2707 2222.64,2707 2531.64,2398 ; 2531.64,2398 2598.48,2398 IC1.18 ; 2531.64,2398 IC1.18 ; IC1.18 2675,2254.64 C2.2 2675,2047.46 2695.46,2027 C14.2 2695.46,1842 2700.46,1837 C15.2 2845,1750 2894,1701 3065.46,1701 ; 2704,490 IC4.4 3088,490 3088,1010 3030,1010 C4.2 3065.46,1070.46 3065.46,1701 ; 2799.84,3337 3089,3337 3102,3324 3102,3092.16 J4.1 3048.48,2901 3053.48,2896 TP2.1 3001,2706.16 3001,2173.93 3055.93,2119 C3.2 3055.93,1851.54 3065.46,1842 C5.2 3065.46,1701
  Bottom Layer w25: J8.3 1087.32,3427.32 1631.57,3427.32 1653.25,3449 1817,3449 1835,3467 2669.84,3467 SW1.3 ; CN6.1 1153,197 1422,197 CN7.1 1551,194 2194,194 C18.2 ; IC1.6 1382,2314.68 1382,2248.07 1250,2248.07 1210,2208.07 1210,2090 1239,2061 1411,2061 1704,1768 v1(1704,1665) ; ZD1.2 2065,805 C17.2 ; IC3.1 2408.61,4047 2759.13,4047 SW1.5 ; C6.2 2830,1035 C4.2
NetC1_1: C1.1 D1.2 IC1.29 | length 804.4
  Top Layer w25: IC1.29 2020,3053.52 C1.1 2020,3187.63 2050,3217.63 2472.75,3217.63 D1.2
NetC1_2: C1.2 J12.3 | length 1202.9
  Top Layer w25: J12.3 1487,3225 1487,3168 1550,3105 1723.71,3105 1747,3081.71 1747,2893.52 1800,2840.52 1987.52,2840.52 2047,2900 2047,2970 2090.93,3013.93 C1.2
NetC2_1: C2.1 IC1.17 L1.1 | length 1008
  Top Layer w25: IC1.17 2498.48,2176.52 2572,2125 ; L1.1 2605,1532 2572,1565 2572,2125 ; C2.1 2572,2125
NetC8_2: C8.2 IC1.38 R4.2 SW1.1 | length 3551.2
  Top Layer w25: R4.2 530.46,3285.47 614.47,3285.47 ; C8.2 614.47,3285.47 ; IC1.38 1098.48,2913.98 1025.5,2841 700,2841 579,2962 579,3250 614.47,3285.47
  Bottom Layer w25: IC1.38 1098.48,3031.48 1150,3083 1338,3083 1446.57,2974.43 1446.57,2918.97 1475,2890.55 1546.57,2890.55 1546.57,3017 1500,3063.57 1500,3283.57 1608.75,3392.32 1666.57,3392.32 1682.62,3408.36 SW1.1
NetC9_2: C9.2 IC1.39 R5.2 SW1.2 | length 3450.2
  Top Layer w25: R5.2 542.46,3520.46 C9.2 727.54,3520.46 848,3400 848,3089.12 IC1.39
  Bottom Layer w25: IC1.39 998.48,2814.52 1063.62,2749.38 1551.69,2749.38 1648,2845.69 1648,3094 1904,3350 2768.54,3350 SW1.2
NetC10_2: C10.2 IC1.37 R6.2 SW1.4 | length 6916.8
  Top Layer w25: IC1.37 1198.48,2778.48 1016,2596 337,2596 283,2650 283,3700 316.47,3733.47 R6.2 526,3733.47 528.46,3735.93 C10.2 685,4980 800,5095 2500,5095 2630.06,4964.94 SW1.4
NetC13_1: C13.1 IC1.10 R8.2 TP4.1 | length 853.8
  Top Layer w25: C13.1 1650,1764.49 1751.93,1764.49 1781.42,1735 R8.2 1826.54,1807 1776,1857.54 1776,2096.16 TP4.1 1803.48,2224 1798.48,2229 IC1.10
NetC14_1: C14.1 IC1.9 R7.2 TP3.1 | length 2292.9
  Top Layer w25: IC1.9 1752.64,2385.32 1812.68,2385.32 1848,2350 1848,2224 1852,2220 1852,1998.46 1826.54,1973 R7.2 ; C14.1 2624.77,1930.23 2624.77,2034.77 v1(2625,2035)
  Bottom Layer w25: TP3.1 1332.91,2213.07 1580.39,2213.07 IC1.9 1801.64,2228 2432,2228 v1(2625,2035)
NetC15_1: C15.1 IC2.3 R14.2 | length 2406.4
  Top Layer w25: R14.2 1293.07,1683 1342,1683 v1(1402,1623) ; IC2.3 2216,1255 2267,1204 2600,1204 2673,1277 2673,1616.54 2629.54,1660 C15.1
  Bottom Layer w25: v1(1402,1623) 1650.79,1623 1656.93,1616.86 2063.14,1616.86 2180,1500 2180,1333.74 IC2.3
NetC16_1: C16.1 IC2.5 R15.2 | length 1588
  Top Layer w25: R15.2 1628.46,1877 1526,1774.54 1526,1500 1561,1465 C16.1 1595,1511 1625,1541 1713,1541 2050,1204 2206.45,1204 2255.45,1155 IC2.5
NetC17_1: C17.1 F1.1 IC4.1 R20.1 R24.1 RE1.4 T3.3 T4.3 | length 4445.6
  Top Layer w25: T4.3 353,1493.16 353,1300 412,1241 719,1241 803,1325 R20.1 896.54,1429 920.88,1453.35 T3.3 ; v1(1213,1145) 1233.44,1124.56 1233.44,1024.56 1266.03,991.97 1376.51,991.97 1418.48,950 ; RE1.4 1418.48,950 ; F1.1 1785,935 ; C17.1 2065,675 1995,675 1831.54,838.46 R24.1 1785,935 ; IC4.1 2621,590 v1(2621,721) ; 1418.48,950 1472.48,1004 1565,1004 1634,935 1785,935
  Bottom Layer w25: T4.3 822.12,1145 v1(1213,1145) ; C17.1 2437,905 v1(2621,721)
NetCN1_1: CN1.1 R14.1 R15.1 R16.2 R17.1 | length 2968.6
  Top Layer w25: CN1.1 630,2100 811.93,2100 836.93,2125 R16.2 916,2160 926,2150 R17.1 ; R14.1 1360,1799 1491,1930 R15.1 1561.54,1968.54 1663,2070 1663,2261 1649,2275 1649,2380 v1(1633,2396)
  Bottom Layer w25: CN1.1 446.94,2283.07 1346.57,2283.07 1346.57,2367.57 1375,2396 v1(1633,2396)
NetCN2_1: CN2.1 L2.1 | length 300.5
  Bottom Layer w25: CN2.1 490,1980 L2.1
NetCN2_2: CN2.2 L2.2 | length 560
  Bottom Layer w25: CN2.2 516,2146 547,2146 693,2000 693,1932 L2.2
NetCN3_1: CN3.1 RE1.5 | length 2406.6
  Top Layer w25: CN3.1 341,816.16 341,322 494,169 1248,169 1542,463 1542,803 1518.48,826.52 RE1.5
NetCN3_2: CN3.2 RE1.8 | length 1428.9
  Top Layer w25: RE1.8 1518.48,1207 v1(1636,1207)
  Bottom Layer w25: CN3.2 1187.64,1018.64 1376,1207 v1(1636,1207)
NetCN4_1: CN4.1 J11.1 | length 391.9
  Bottom Layer w25: CN4.1 470,555 J11.1
NetCN4_2: CN4.2 J10.3 | length 851.9
  Bottom Layer w25: CN4.2 1165,480 J10.3
NetCN5_1: CN5.1 J11.2 | length 374.9
  Top Layer w25: CN5.1 665,350 J11.2
NetCN5_2: CN5.2 J10.2 | length 641
  Bottom Layer w25: CN5.2 913,373 1158,373 J10.2
NetCN6_2: CN6.2 J10.1 | length 364.9
  Top Layer w25: CN6.2 1430,470 J10.1
NetCN7_2: CN7.2 F1.2 | length 331.3
  Top Layer w25: CN7.2 1785,420 F1.2
NetD2_2: D2.2 RE1.12 T5.3 | length 1147.7
  Top Layer w25: T5.3 671,1000 v1(713.75,957.25) ; RE1.12 1118.48,1029.02 1161,986.5 1161,765.96 D2.2
  Bottom Layer w25: v1(713.75,957.25) 975,957.25 1138.68,793.58 D2.2
NetDP1_1: DP1.1 IC3.15 | length 1858.8
  Top Layer w25: DP1.1 1463,4687 1465,3497 1665.07,3497 IC3.15
NetDP1_2: DP1.2 IC3.4 | length 1819.6
  Bottom Layer w25: DP1.2 1364,4886 1364,3803 1422,3745 1806.61,3745 IC3.4
NetDP1_3: DP1.3 IC3.14 | length 1521.3
  Top Layer w25: DP1.3 1564,4786 1564,3594.89 IC3.14
NetDP1_4: DP1.4 IC3.3 | length 2173.2
  Bottom Layer w25: DP1.4 1543,5033 2300,5033 2333,5000 2333,4171.39 IC3.3
NetDP1_5: DP1.5 IC3.5 | length 1470.6
  Top Layer w25: DP1.5 1580,4869 1662,4787 1662,3747.61 1685.61,3724 IC3.5
NetDP1_6: DP1.6 IC3.9 | length 1228.5
  Bottom Layer w25: IC3.9 1680,4118.39 DP1.6
NetDP1_7: DP1.7 IC3.6 | length 1145.7
  Top Layer w25: IC3.6 1780,3918.39 DP1.7
NetDP1_8: DP1.8 IC3.7 | length 1228.5
  Bottom Layer w25: IC3.7 1880,4118.39 DP1.8
NetDP1_9: DP1.9 IC3.8 | length 1527
  Bottom Layer w25: IC3.8 1578.35,3787 1725,3787 1763,3825 1763,3893 1980,4110 DP1.9
NetDP1_10: DP1.10 IC3.13 | length 1854.2
  Bottom Layer w25: IC3.13 1528.58,3560.51 1528.58,3630.31 1861.41,3630.31 1963,3731.9 1963,3898 2080,4015 DP1.10
NetDP1_11: DP1.11 IC3.2 | length 1145.7
  Top Layer w25: IC3.2 2113.48,4903.48 DP1.11
NetDP1_12: DP1.12 IC3.12 | length 2772.6
  Top Layer w25: IC3.12 1413.48,3671.52 1127,3958 1127,5000 1168,5041 2209,5041 DP1.12
NetIC1_1: IC1.1 R18.1 | length 1852.8
  Top Layer w25: v1(1250,1987) 1250,1955 1275,1930 R18.1
  Bottom Layer w25: IC1.1 819.64,2410 361,2410 326,2375 326,2293 405,2214 1023,2214 v1(1250,1987)
NetIC1_2: IC1.2 J4.2 R1.2 | length 2807.3
  Top Layer w25: R1.2 2954.84,3045 J4.2
  Bottom Layer w25: IC1.2 1261.32,2594 2818,2594 2978,2754 2978,3068.16 J4.2
NetIC1_7: IC1.7 J5.2 | length 196.7
  Top Layer w25: IC1.7 1498.48,2239 1508.48,2229 J5.2
NetIC1_8: IC1.8 J5.1 | length 196.7
  Top Layer w25: IC1.8 1598.48,2239 1608.48,2229 J5.1
NetIC1_11: IC1.11 R24.2 R25.2 ZD1.1 | length 5241
  Top Layer w25: R24.2 1898.46,975 ; R25.2 1898.46,1120.54 ; v1(1922,1097) 1898.46,1120.54 ; ZD1.1 2005,405 1561,849 1561,957 1476,957 1461,942 1461,825 1250,825 1196,879 1196,1073 1165,1104 1165,1193 1269,1193 1269,1100 1329,1040 1833.46,1040 1898.46,975 ; 1898.46,975 1898.46,1097 1898.46,1120.54
  Bottom Layer w25: IC1.11 1963.64,2266 2626,2266 2673,2219 2673,1528 2450,1305 2390.73,1305 2292.7,1206.97 2292.7,1190.53 2194.68,1092.5 1926.5,1092.5 v1(1922,1097)
NetIC1_12: IC1.12 J7.1 | length 212.5
  Top Layer w25: J7.1 IC1.12
NetIC1_13: IC1.13 J7.2 | length 212.5
  Top Layer w25: J7.2 IC1.13
NetIC1_14: IC1.14 J7.3 | length 212.5
  Top Layer w25: J7.3 IC1.14
NetIC1_15: IC1.15 J7.4 | length 212.5
  Top Layer w25: J7.4 IC1.15
NetIC1_16: IC1.16 J7.5 | length 212.5
  Top Layer w25: J7.5 IC1.16
NetIC1_19: IC1.19 R23.2 | length 3243.1
  Top Layer w25: R23.2 936.93,900.86 v1(941,904.93)
  Bottom Layer w25: v1(941,904.93) 941,830 1081,690 1210,690 1568.97,1048.97 2451.97,1048.97 2708,1305 2708,2263 IC1.19
NetIC1_20: IC1.20 J6.3 | length 260.2
  Bottom Layer w25: IC1.20 2922,2331.16 2930.84,2340 J6.3
NetIC1_21: IC1.21 J6.1 | length 1306.6
  Bottom Layer w25: IC1.21 2798.48,3064.48 3054,3320 3102,3272 3102,2587 J6.1
NetIC1_22: IC1.22 J6.2 | length 1689.8
  Bottom Layer w25: IC1.22 2698.48,3014.98 3109.5,3426 3111,3426 3137,3400 3137,2522 J6.2
NetIC1_23: IC1.23 J3.3 | length 245.9
  Top Layer w25: J3.3 2598.48,2993.64 IC1.23
NetIC1_24: IC1.24 J3.2 | length 245.9
  Top Layer w25: J3.2 2498.48,2993.64 IC1.24
NetIC1_27: IC1.27 J12.1 | length 980.2
  Top Layer w25: J12.1 1532,3325 1540,3333 1615,3333 1798,3150 v1(1798,3099)
  Bottom Layer w25: v1(1798,3099) 2038.12,3099 IC1.27
NetIC1_28: IC1.28 J12.4 | length 2985.9
  Top Layer w25: J12.4 1341,3225 1341,3375 1643,3375 1763,3495 1763,3575 1791,3603 1948,3603 2165,3820 2165,3900 2290,3900 2340,3850 2340,3590 2588,3342 2588,3192 2578.63,3182.63 2209.48,3182.63 2209.48,3049.64 IC1.28
NetIC1_30: IC1.30 J12.5 | length 631.2
  Top Layer w25: J12.5 1414,3125 1414,3044 1425,3033 v1(1696,3033)
  Bottom Layer w25: v1(1696,3033) 1840.48,3033 1898.48,2975 IC1.30
NetIC1_33: IC1.33 J8.1 | length 963.8
  Bottom Layer w25: J8.1 1048,3102 1048,2900 1163.62,2784.38 1510.41,2784.38 1598.48,2872.45 IC1.33
NetIC1_34: IC1.34 J8.2 | length 648.6
  Bottom Layer w25: J8.2 1240.21,3245 1498.48,2986.73 IC1.34
NetIC1_35: IC1.35 IC3.17 R3.2 | length 2450.6
  Top Layer w25: R3.2 690,2925 725,2890 1025,2890 1047,2912 1047,2959 1050,2962 ; v1(1149,2988) 1076,2988 1050,2962 ; v1(1210,3610) 1109,3509 1109,3097 1050,3038 1050,2962
  Bottom Layer w25: v1(1149,2988) 1349.12,2988 IC1.35 ; v1(1210,3610) 1430,3610 1465,3575 1465,3525 1492.68,3497.32 1534.32,3497.32 1565,3528 1565,3594 1864.89,3594 IC3.17
NetIC1_36: IC1.36 IC3.18 R2.2 | length 4625.7
  Top Layer w25: R2.2 321,2986.54 321,2711.29 384.29,2648 930,2648 v1(1149,2867) ; IC1.36 v1(1579.12,2658)
  Bottom Layer w25: v1(1149,2867) 1172,2890 1249.84,2890 IC1.36 ; v1(1579.12,2658) 1987,2658 2250,2921 2250,2968 2275,2993 2548.74,2993 2885,3329.26 2885,3552 2851,3586 2391,3586 2338,3639 2107.07,3639 IC3.18
NetIC1_40: IC1.40 TP1.1 | length 602.5
  Bottom Layer w25: TP1.1 719.84,2760 IC1.40
NetIC2_1: IC2.1 R8.1 R9.1 | length 477
  Top Layer w25: R8.1 R9.1 2090,1606.26 IC2.1
NetIC2_2: IC2.2 R10.1 R12.2 | length 1539.4
  Top Layer w25: v1(1443.46,1379) R12.2 ; IC2.2 2153.05,1355 2488.05,1690 2488.05,1796.05 2375,1796.05 R10.1
  Bottom Layer w25: v1(1443.46,1379) 1467.46,1355 IC2.2
NetIC2_6: IC2.6 R11.1 R13.2 | length 1065
  Top Layer w25: R11.1 R13.2 2366.54,1868.46 2400,1835 2519.1,1835 2523.05,1831.05 2523.05,1369.31 IC2.6
NetIC2_7: IC2.7 R7.1 R11.2 | length 1020
  Top Layer w25: R7.1 1987,1930 1992,1925 R11.2 v1(2086.54,1847.46)
  Bottom Layer w25: v1(2086.54,1847.46) 2164.8,1847.46 2500,1512.26 2500,1446.26 IC2.7
NetL2_4: L2.4 T4.2 TP5.1 | length 2536.5
  Bottom Layer w25: T4.2 353,1514.12 353,1600 419,1666 1143,1666 1349,1460 1461,1460 ; L2.4 1461,1460 ; TP5.1 1461,1460
NetR9_2: R9.2 R10.2 | length 347.7
  Top Layer w25: R9.2 2233,1735 2275,1693 2430.46,1693 2441.93,1704.46 R10.2
NetR18_2: R18.2 R19.1 T1.1 | length 1752.9
  Top Layer w25: R19.1 1070,2037 1123,2090 1288,2090 1348,2150 1348,2362 1375,2389 1447,2389 1447,2048 1375,1976 R18.2 1375,1889 1350,1864 1300,1864 1238.4,1802.4 T1.1
NetR20_2: R20.2 T1.3 T2.1 T3.1 | length 1706.3
  Top Layer w25: v1(615,1470) 613.29,1471.71 613.29,1564.04 T2.1 612.6,1608 680.28,1608 772.28,1700 900.28,1700 958.28,1642 T3.1 958.28,1481.18 963.46,1476 R20.2 ; T1.3 1201,1407.12 1228.34,1379.78 1270.22,1379.78 v1(1275,1375)
  Bottom Layer w25: v1(615,1470) 863.88,1470 900.88,1507 1143,1507 v1(1275,1375)
NetR21_1: R21.1 T4.1 | length 222.8
  Top Layer w25: T4.1 516,1353.64 527.36,1365 R21.1
NetR21_2: R21.2 T2.2 T3.2 | length 428.9
  Top Layer w25: R21.2 698.46,1459 687.4,1470.06 T2.2 756.31,1633.64 T3.2
NetR22_1: R22.1 R23.1 T5.1 | length 422.7
  Top Layer w25: T5.1 754.2,1085 R22.1 871.54,986.31 870,984.77 R23.1
pads on no net: IC1.3 IC1.4 IC1.25 IC1.26 IC3.10 IC3.11 IC3.19 IC3.20 J12.MH1 J12.MH2 RE1.3 RE1.10 SW1.6 SW1.7

## Silkscreen, mask and mechanical layers (free items; w line width, h text height)
Top Overlay:
  text "Display" at 350,4340 h200
Board:
  lines w47.24: 399.93,875.09 cw(c403.48,878.64) 407.03,882.18 ; 399.93,875.09 cw(c403.48,878.64) 407.03,882.18 ; 399.93,875.09 1074.93,200.09 ; 399.93,875.09 1074.93,200.09 ; 407.03,882.18 1080.56,208.65 407.03,882.18 ; 1074.93,200.09 1078.48,198.62 ; 1074.93,200.09 1078.48,198.62 ; 1078.48,198.62 1580.48,198.62 ; 1078.48,198.62 1580.48,198.62 ; 1513.47,867.64 ccw(c1518.48,867.64) 1518.48,862.62 ; 1513.47,867.64 ccw(c1518.48,867.64) 1518.48,862.62 ; 1513.47,867.64 1513.47,891.16 ; 1513.47,867.64 1513.47,891.16 ; 1513.47,891.16 cw(c1518.48,891.16) 1523.5,891.16 ; 1513.47,891.16 cw(c1518.48,891.16) 1523.5,891.16 ; 1518.48,862.62 1538.4,862.62 ; 1518.48,862.62 1538.4,862.62 ; 1523.5,872.65 1540.48,872.65 ; 1523.5,872.65 1523.5,891.16 ; 1523.5,872.65 1540.48,872.65 ; 1523.5,872.65 1523.5,891.16 ; 1538.4,862.62 1615.47,785.56 ; 1538.4,862.62 1615.47,785.56 ; 1540.48,872.65 1544.03,871.18 ; 1540.48,872.65 1544.03,871.18 ; 1544.03,871.18 1624.03,791.18 ; 1544.03,871.18 1624.03,791.18 ; 1580.48,198.62 1584.03,200.09 ; 1580.48,198.62 1584.03,200.09 ; 1584.03,200.09 1624.03,240.09 ; 1584.03,200.09 1624.03,240.09 ; 1615.47,245.71 1615.47,785.56 ; 1615.47,245.71 1578.4,208.65 1615.47,245.71 ; 1615.47,245.71 1615.47,785.56 ; 1624.03,240.09 1625.5,243.64 ; 1624.03,240.09 1625.5,243.64 ; 1624.03,791.18 1625.5,787.64 ; 1624.03,791.18 1625.5,787.64 ; 1625.5,243.64 1625.5,787.64

## Text inside footprints (layer, text, board x,y; h text height)
J7: Top Overlay "5" at 2383.52,2185.57 h40; Top Overlay "1" at 1993.76,2185.57 h40
J12: Top Overlay "6" at 1285.67,3059.64 h40 r90; Top Overlay "5" at 1431.34,3059.64 h40 r90; Top Overlay "2" at 1285.67,3366.73 h40 r90; Top Overlay "1" at 1431.34,3366.73 h40 r90